# Altium PCB Remote-control.PcbDoc
Units mm, origin at the board's own origin, x right, y up, seen from the top; angles counter-clockwise.
Board outline 300 x 200 mm, 2 copper layers (Top Layer, Bottom Layer); 14 components, 39 nets, 95 pads, 0 vias.
Unrouted connection lines stored in the file: 6.
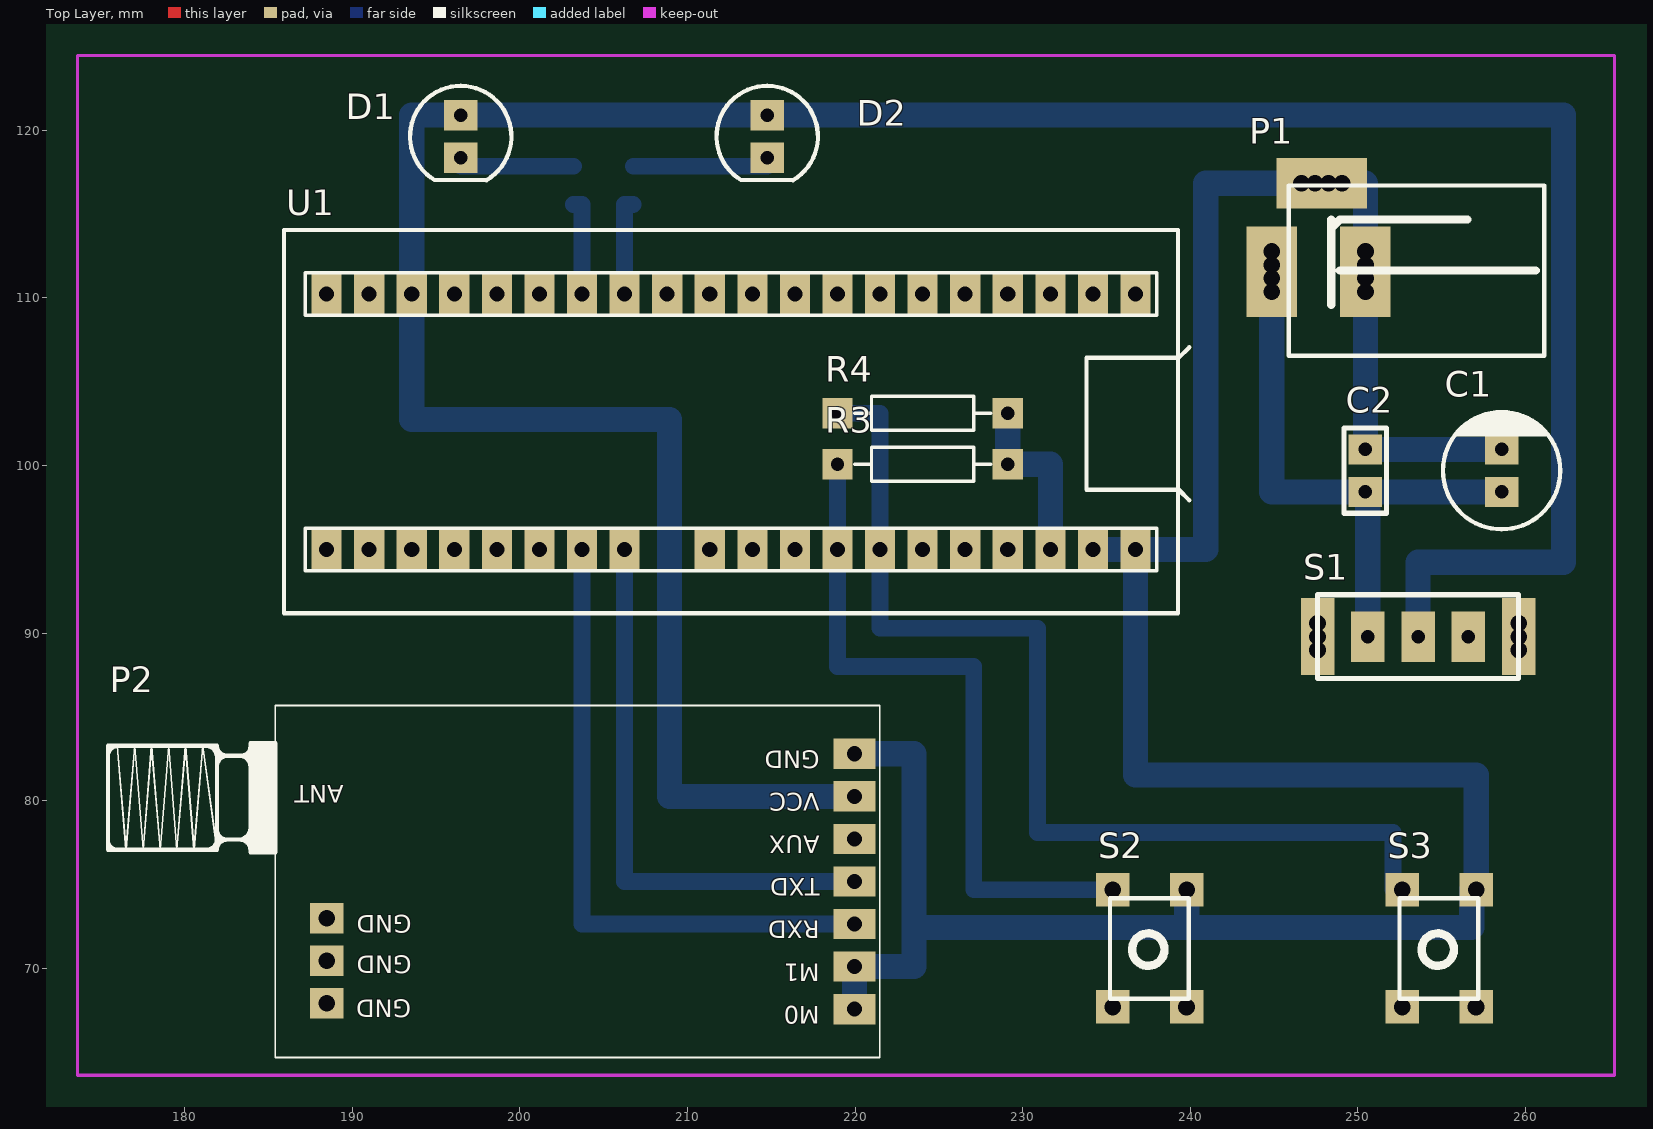
[diagram p0: Top Layer view]
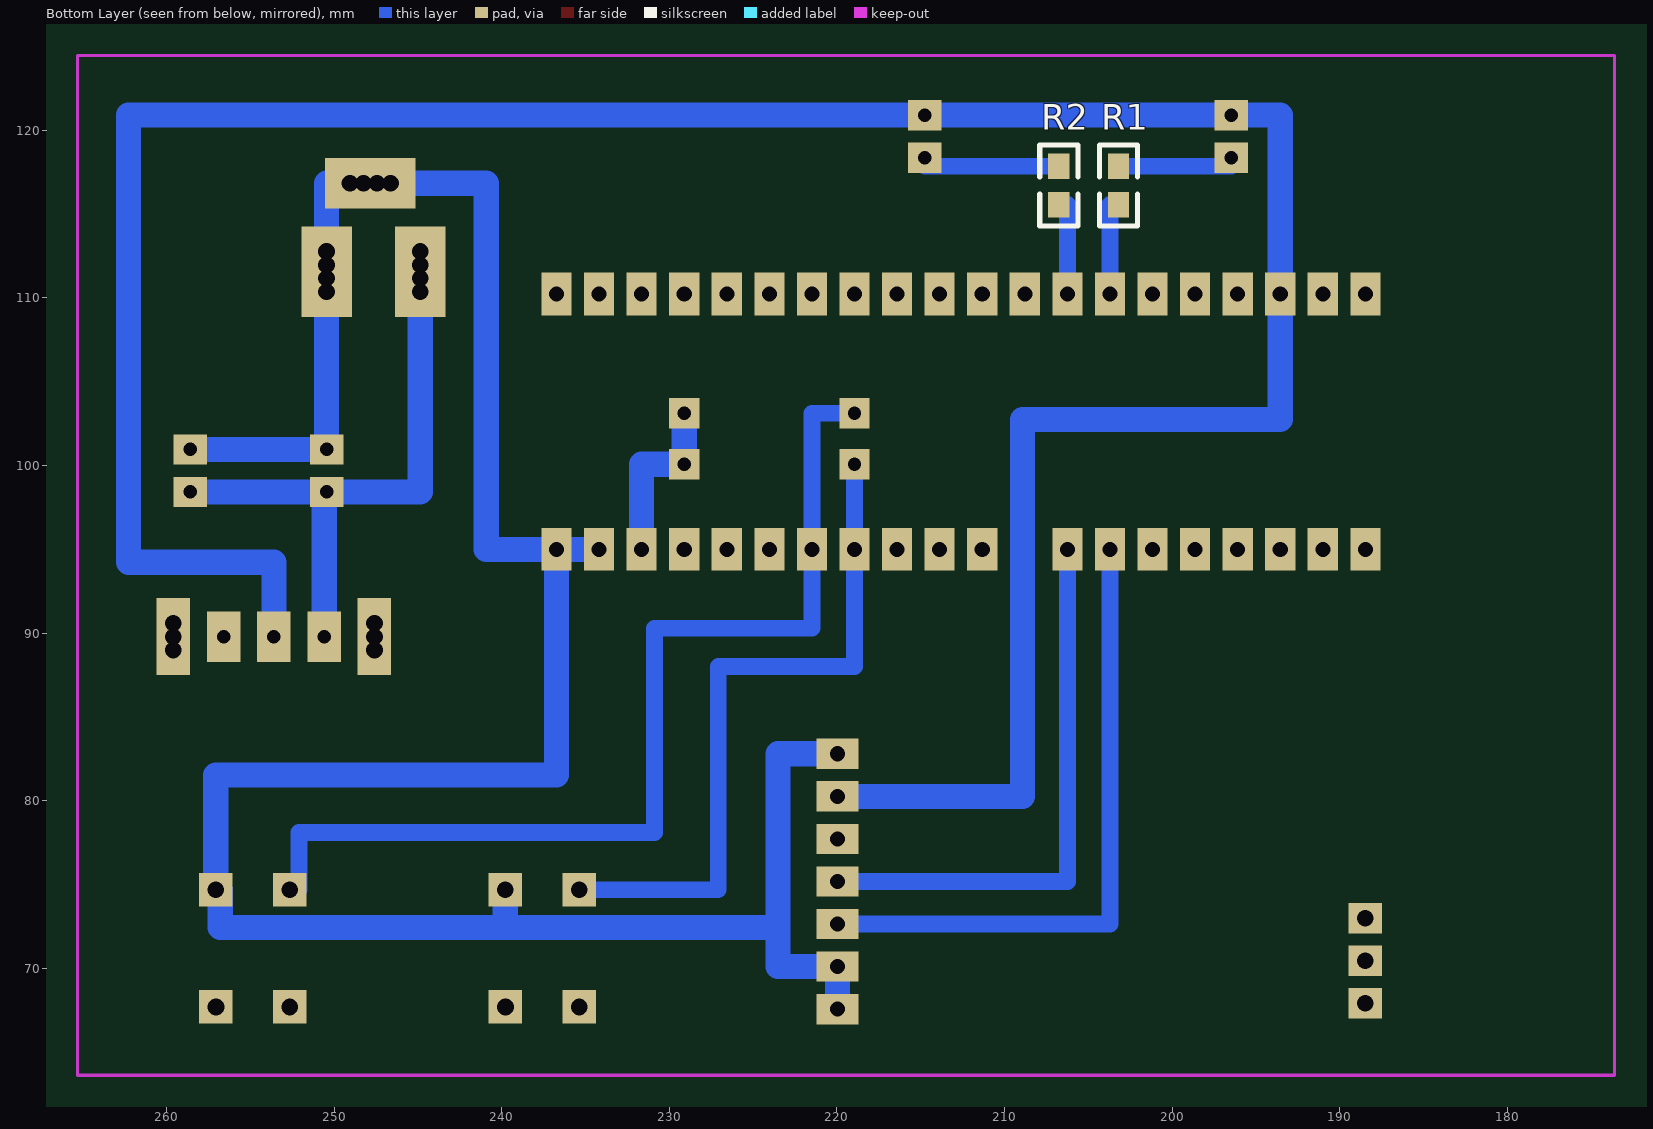
[diagram p1: Bottom Layer view, seen from below]

## Layer stack, top to bottom
Top Layer: signal copper 0.0356
Dielectric: dielectric 0.32, FR-4, Dk 4.8
Bottom Layer: signal copper 0.0356

## Board outline
0,200 300,200 300,0 0,0

## Design rules (kind name [scope] priority, off if disabled: settings)
Clearance [All] p1: gap=0.5
PolygonConnect [All] p1: connectstyle=Relief reliefconductorwidth=0.254 reliefentries=4 polygonreliefangle="90 Angle"
RoutingVias [All] p1: holewidth=0.6 width=1 viastyle="Through Hole" minholewidth=0.711 minwidth=1.27 maxholewidth=0.711 maxwidth=1.27
SilkscreenOverComponentPads [All] p1: minsilkscreentomaskgap=0.254
SolderMaskExpansion [All] p1: expansion=0.102
TestPointUsage [All] p1: valid=0 allowmultiple=FALSE
Testpoint [All] p1: side=15 testpointundercomponent=TRUE minsize=1.016 maxsize=2.54 preferedsize=1.524 minholesize=0 maxholesize=1.016 preferedholesize=0.813 testpointgrid=0.025 style=1023 order=0-112345678
Width [All] p1: maxlimit=1.5 minlimit=0.2 preferedwidth=0.6
23 further rules are at their usual default settings.

## Components (designator, comment, footprint, x,y, rotation, side; value= is the part's Value field where it differs from the comment)
C1 "Cap Pol1" cd0.254 258.572,98.425 r90 top
C2 "Cap" cc0.254 250.444,100.965 r270 top
D1 "二极管--发光" LED-5 196.469,120.904 r270 top
D2 "二极管--发光" LED-5 214.757,120.904 r270 top
P1 "插口-POWER" POW-DC 256.032,116.713 r180 top
P2 "Header 7" PE32(433T20DC) 219.964,67.564 r180 top
R1 "Res2" 0805 203.2,117.856 r270 bottom
R2 "Res2" 0805 206.756,117.856 r270 bottom
R3 "Res2" AXIAL-0.4 224.028,100.076 r0 top
R4 "Res2" AXIAL-0.4 224.028,103.124 r0 top
S1 "开关-SW-SPDT" SW3 259.588,89.789 r180 top
S2 "开关-微动" sw4/6 239.776,74.676 r270 top
S3 "开关-微动" sw4/6 257.048,74.676 r270 top
U1 "Core_STM32_YX" Core_STM32_YX 188.468,94.996 r0 top

## Footprints (in the part's own frame and the unit in brackets; to place one, negate y for a bottom-side part, rotate by r counter-clockwise, add the part's x,y. Pads: shape width x height; smd on the part's side, far side on the other; paste and mask are expansions set on the pad)
0805 [mil]
  rect 60x50 smd: 1(0,0) 2(90,0)
  silkscreen extent -50,-45 140,45
AXIAL-0.4 [mm] "Resistor; 2 Leads"
  rect 1.8x1.8 hole 0.8: 1(-5.08,0) 2(5.08,0)
  silkscreen extent -4.06,-1.02 4.06,1.02
cc0.254 [mm]
  rect 1.8x2 hole 0.8: 1(0,0) 2(2.54,0)
  silkscreen extent -1.27,-1.27 3.81,1.27
cd0.254 [mm]
  rect 1.8x2 hole 0.8: 1(0,0) 2(2.54,0)
  silkscreen extent -2.23,-3.5 4.77,3.5
Core_STM32_YX [mm]
  rect 1.8x2.54 hole 0.9: 1(0,0) 2(2.54,0) 3(5.08,0) 4(7.62,0) 5(10.16,0) 6(12.7,0) 7(15.24,0) 8(17.78,0) 10(22.86,0) 11(25.4,0) 12(27.94,0) 13(30.48,0) 14(33.02,0) 15(35.56,0) 16(38.1,0) 17(40.64,0) 18(43.18,0) 19(45.72,0) 20(48.26,0) 21(48.26,15.24) 22(45.72,15.24) 23(43.18,15.24) 24(40.64,15.24) 25(38.1,15.24) 26(35.56,15.24) 27(33.02,15.24) 28(30.48,15.24) 29(27.94,15.24) 30(25.4,15.24) 31(22.86,15.24) 32(20.32,15.24) 33(17.78,15.24) 34(15.24,15.24) 35(12.7,15.24) 36(10.16,15.24) 37(7.62,15.24) 38(5.08,15.24) 39(2.54,15.24) 40(0,15.24)
  rect 0x0 all layers, no hole: 9(20.32,0)
  silkscreen extent -2.54,-3.81 51.47,19.05
LED-5 [mm]
  rect 1.8x2 hole 0.8: 1(0,0) 2(2.54,0)
  silkscreen extent -1.75,-3.02 3.88,3.02
PE32(433T20DC) [mm] "36mm*21mm-D/SMA长度12.5mm"
  rect 2.5x1.8 hole 0.9: 1(0,0) 2(0,-2.54) 3(0,-5.08) 4(0,-7.62) 5(0,-10.16) 6(0,-12.7) 7(0,-15.24)
  rect 2x1.8 hole 1: 8(31.49,-5.43) 9(31.49,-2.89) 10(31.49,-0.35)
  silkscreen extent -1.51,-18.12 44.54,2.88
POW-DC [mm]
  rect 3x3 hole 1: 1(5.588,3.937) 1(5.588,4.741) 1(5.588,5.546) 1(5.588,6.35) 2(6.985,-0.127) 2(7.789,-0.127) 2(8.594,-0.127) 2(9.398,-0.127) 3(11.176,6.35) 3(11.176,3.937) 3(11.176,4.741) 3(11.176,5.546)
  silkscreen extent -5.08,0 10.16,10.16
SW3 [mm]
  rect 2x3 hole 1: 0(0,0.8) 0(0,0) 0(0,-0.8) 0(12,-0.8) 0(12,0) 0(12,0.8)
  rect 2x3 hole 0.8: 1(6,0) 2(3,0) 3(9,0)
  silkscreen extent 0,-2.5 12,2.5
sw4/6 [mm]
  rect 2x2 hole 1: 1(-0.02,0.01) 1(6.98,0) 2(-0.02,-4.4) 2(6.98,-4.4)
  silkscreen extent 0.49,-4.57 6.49,0.13

## Part data
C1: "Polarized Capacitor (Radial)"
C2: "Capacitor"
P2: "Header, 7-Pin"
R1 R2 R3 R4: "Resistor"

## Nets (pads, with @x,y where several pads share a name; then routed paths per layer and width w, separated by ;. In a path a pad name is that pad's centre, name@x,y a point inside that pad or via, vN(x,y) a via of type N, cw(c..) or ccw(c..) an arc to the next point about the centre after c; other vN are vias at no path point)
3V3: R3.2 R4.2 U1.18 U1.40 | length 10.7
  Bottom Layer w1.5: R4.2 R3.2 231.648,100.076 U1.18
+5V: D1.1 D2.1 P2.6 S1.1 U1.38 | length 175.5
  Bottom Layer w1.5: P2.6 208.915,80.264 208.915,102.743 193.548,102.743 U1.38 193.548,120.904 D1.1 D2.1 262.255,120.904 262.255,94.234 253.588,94.234 S1.1
GND: C1.2 C2.1 P1.1 P1.2 P2.1 P2.2 P2.7 S2.1 S3.1 U1.19 U1.20 U1.39 | length 163.1
  Bottom Layer w1.5: P2.1 P2.2 223.52,70.104 223.52,72.446 ; P2.7 223.52,82.804 223.52,72.446 ; U1.19 U1.20 ; S2.1@239.786,74.696 239.786,72.446 ; C1.2 C2.1 250.444,116.84 249.047,116.84 248.243,116.84 247.438,116.84 246.634,116.84 240.919,116.84 240.919,94.996 U1.20 ; 223.52,72.446 239.786,72.446 ; U1.20 236.728,81.534 257.058,81.534 257.058,74.696 256.794,74.696 256.794,72.446 239.786,72.446
NetC1_1: C1.1 C2.2 P1.3 S1.3 | length 34.3
  Bottom Layer w1.5: P1.3@244.856,110.363 244.856,98.425 C2.2 C2.2@250.588,98.425 ; S1.3 C2.2@250.588,98.425 ; C1.1 C2.2@250.588,98.425
NetD1_2: D1.2 R1.1 | length 7.2
  Bottom Layer w1: D1.2 196.469,117.856 R1.1
NetD2_2: D2.2 R2.1 | length 14
  Bottom Layer w1: 212.217,117.856 R2.1 214.757,117.856 D2.2
PA0: U1.5
PA1: U1.6
PA2: P2.3 U1.7 | length 38.6
  Bottom Layer w1: U1.7 203.708,72.644 P2.3
PA3: P2.4 U1.8 | length 33.5
  Bottom Layer w1: U1.8 206.248,75.184 P2.4
PA4: U1.9
PA5: U1.10
PA6: U1.11
PA7: U1.12
PA8: U1.25
PA9: U1.26
PA10: U1.27
PA11: U1.28
PA12: U1.29
PA15: U1.30
PB0: R3.1 S2.2 U1.13 | length 41.8
  Bottom Layer w1: R3.1 U1.13 218.948,88.011 227.076,88.011 227.076,74.696 S2.2@235.376,74.696
PB1: R4.1 S3.2 U1.14 | length 62.1
  Bottom Layer w1: R4.1 221.488,103.124 U1.14 221.488,90.297 230.886,90.297 230.886,78.105 252.095,78.105 252.095,74.696 S3.2@252.648,74.696
PB3: U1.31
PB4: U1.32
PB5: R2.2 U1.33 | length 5.8
  Bottom Layer w1: U1.33 206.248,115.57 R2.2
PB6: R1.2 U1.34 | length 5.8
  Bottom Layer w1: R1.2 203.708,115.57 U1.34
PB7: U1.35
PB8: U1.36
PB9: U1.37
PB10: U1.15
PB11: U1.16
PB12: U1.21
PB13: U1.22
PB14: U1.23
PB15: U1.24
PC13: U1.2
PC14: U1.3
PC15: U1.4
VBAT: U1.1
pads on no net: P2.5 P2.8 P2.9 P2.10 S1.0 S1.2 U1.17

## Keep-outs
Keep-Out Layer:
  lines w0.2: 173.609,63.627 265.303,63.627 265.303,124.46 173.609,124.46 173.609,63.627

## Text inside footprints (layer, text, board x,y; h text height)
P2: Top Overlay "GND" at 217.901,83.344 h1.8 r180; Top Overlay "VCC" at 217.901,80.804 h1.8 r180; Top Overlay "AUX" at 217.901,78.264 h1.8 r180; Top Overlay "TXD" at 217.901,75.724 h1.8 r180; Top Overlay "RXD" at 217.901,73.184 h1.8 r180; Top Overlay "M1" at 217.901,70.644 h1.8 r180; Top Overlay "M0" at 217.901,68.104 h1.8 r180; Top Overlay "ANT" at 189.484,81.28 h1.8 r180; Top Overlay "GND" at 193.517,68.485 h1.8 r180; Top Overlay "GND" at 193.548,71.12 h1.8 r180; Top Overlay "GND" at 193.548,73.533 h1.8 r180